# Altium PCB msp430g2553.PcbDoc
Units mil, origin at the board's own origin, x right, y up, seen from the top; angles counter-clockwise.
Board outline 2835.03 x 2250.03 mil, 2 copper layers (Top Layer, Bottom Layer); 24 components, 21 nets, 103 pads, 0 vias.
Unrouted connection lines stored in the file: 61.
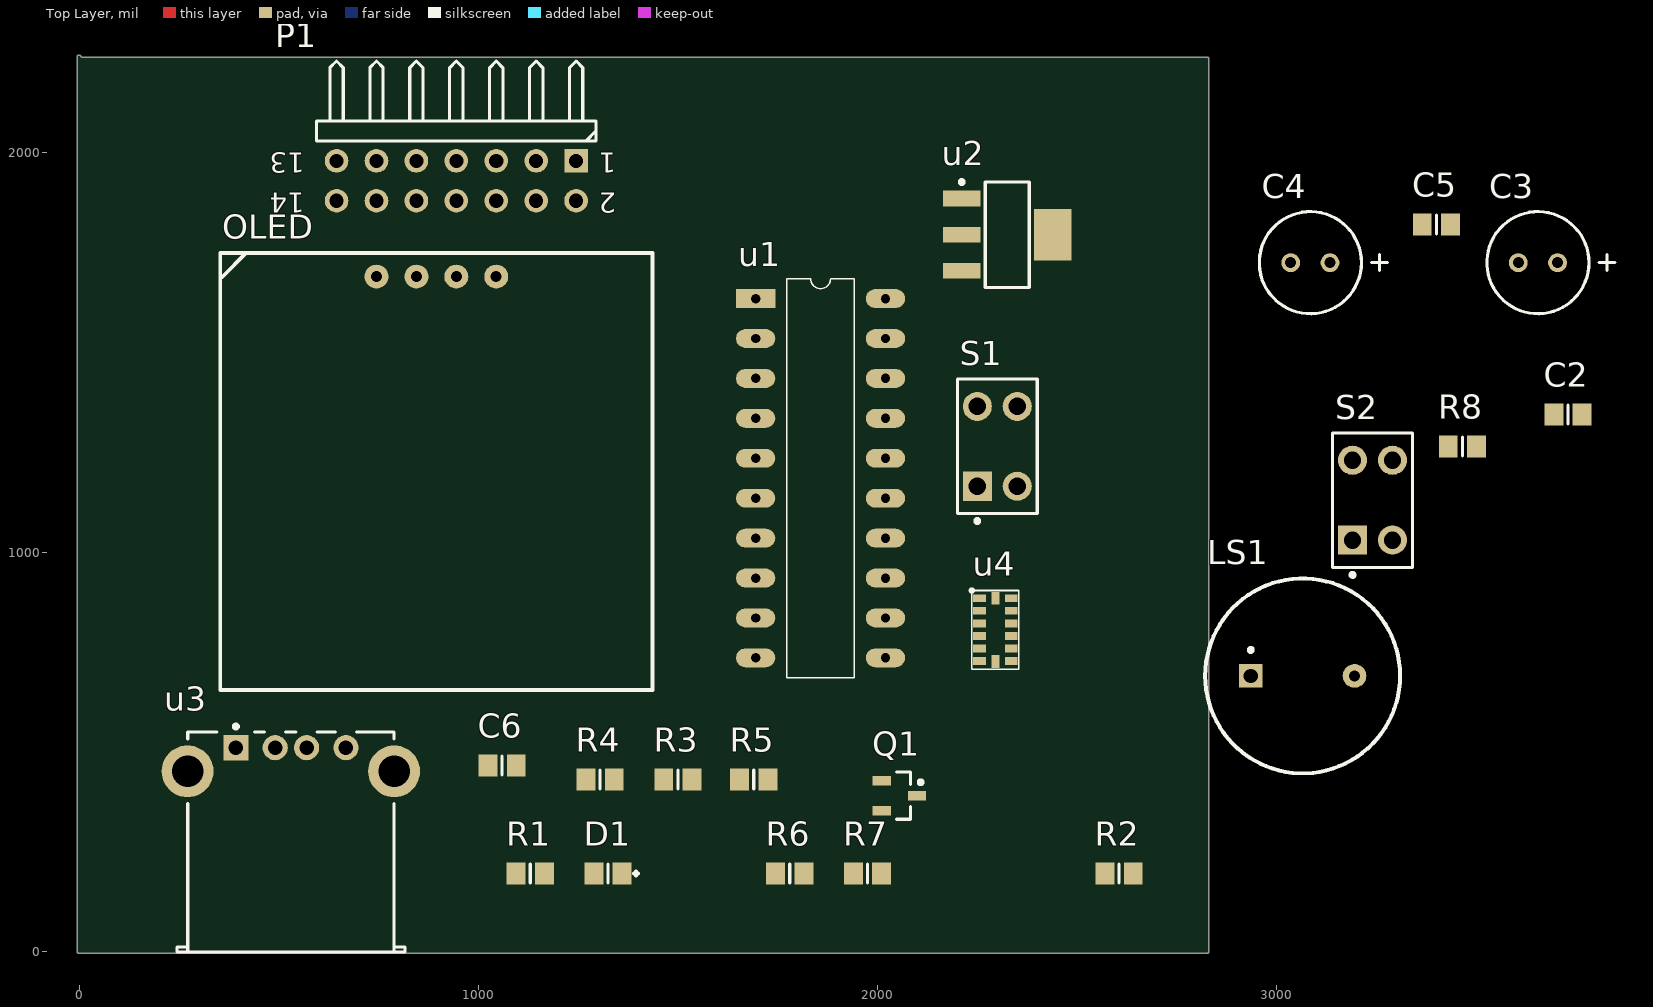
[diagram p0: Top Layer view]
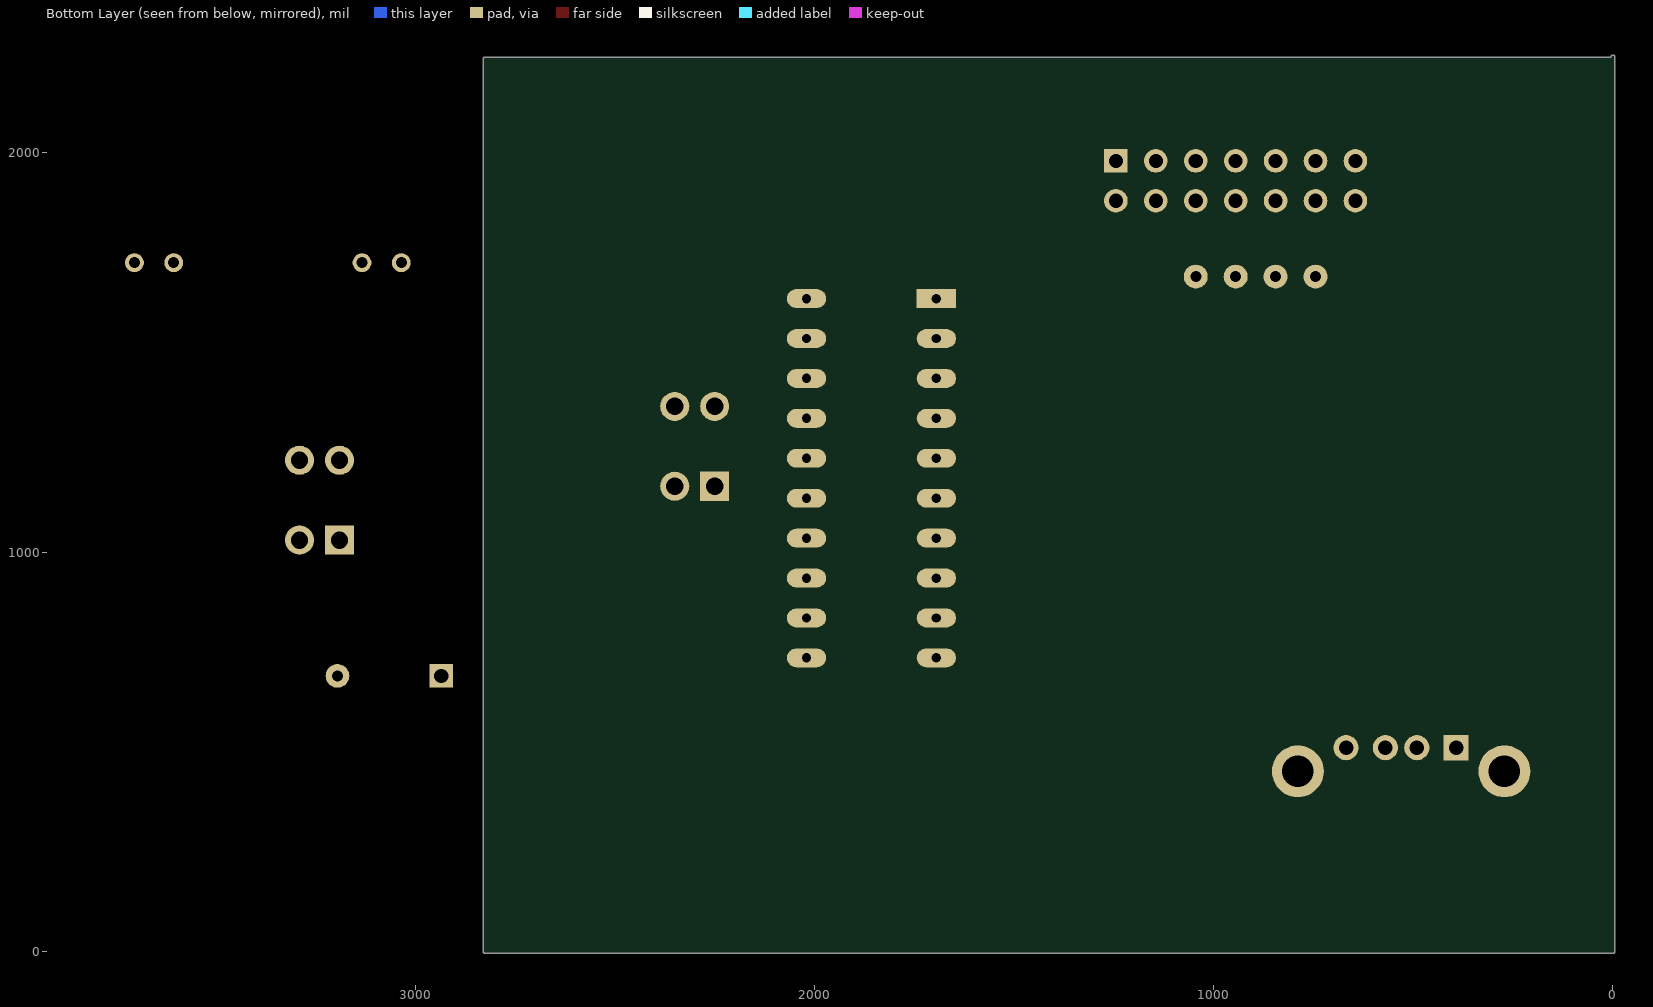
[diagram p1: Bottom Layer view, seen from below]

## Layer stack, top to bottom
Top Solder: solder mask 0.4, Solder Resist, Dk 3.5
Top Layer: signal copper 1.4
Dielectric 1: dielectric 12.6, FR-4, Dk 4.8
Bottom Layer: signal copper 1.4
Bottom Solder: solder mask 0.4, Solder Resist, Dk 3.5

## Board outline
0,-5.02 cw(c0,0) -5.02,0 -5.02,2240 cw(c0,2240) 5.02,2240.01 2825,2240.01 cw(c2825,2235) 2830.01,2235 2830.01,0 cw(c2825,0) 2825,-5.02

## Design rules (kind name [scope] priority, off if disabled: settings)
Clearance [All] p1: gap=10 ignorepadtopadclearanceinfootprint=FALSE except(0: Arc-Hole Track-Hole SMDPad-Hole THPad-Hole Via-Hole Fill-Hole Poly-Hole Region-Hole Text-Hole)
PolygonConnect [All] p1: connectstyle=Relief reliefconductorwidth=10 reliefentries=4 polygonreliefangle="90 Angle" airgapwidth=10
RoutingVias [All] p1: holewidth=28 width=50 viastyle="Through Hole" minholewidth=28 minwidth=50 maxholewidth=28 maxwidth=50
SolderMaskExpansion [All] p1: expansion=4
Width [All] p1: maxlimit=10 minlimit=10 preferedwidth=10
30 further rules are at their usual default settings.

## Components (designator, comment, footprint, x,y, rotation, side; value= is the part's Value field where it differs from the comment)
C2 "Cap" 6-0805_N 3729.57,1345 r0 top value=0.1uf
C3 "Cap Pol2" Cap2_polar 3605,1725 r0 top value=100uf
C4 "Cap Pol2" Cap2_polar 3035,1725 r0 top value=100uf
C5 "Cap" 6-0805_N 3400,1820 r0 top value=0.1uf
C6 "Cap" 6-0805_N 1059.57,465 r0 top value=0.1uf
D1 "LED0" "6-0805_N - duplicate" 1325,195 r0 top
LS1 "Bell" bell 2935,690 r0 top
OLED "+5" OLED 353.66,654.57 r0 top
P1 "JTAG" HDR2X7H 1245,1980 r180 top
Q1 "NPN" SOT23_N 2055,390 r0 top
R1 "Res2" 6-0805_N 1130,195 r0 top value=4.7k
R2 "Res2" 6-0805_N 2605,195 r0 top value=100R
R3 "Res2" 6-0805_N 1500,430 r0 top value=10K
R4 "Res2" 6-0805_N 1305,430 r0 top value=10K
R5 "Res2" 6-0805_N 1690,430 r0 top value=10K
R6 "Res2" 6-0805_N 1780,195 r0 top value=2K
R7 "Res2" 6-0805_N 1975,195 r0 top value=2K
R8 "Res2" 6-0805_N 3465,1265 r0 top value=2K
S1 "SW-DPST" DPST-4 2300,1265 r90 top
S2 "SW-DPST" DPST-4 3240,1130 r90 top
u1 "msp430g2553_PDIP20" DIP20 1694.8,1635 r0 top
u2 "AMS1117-3.3V" SOT223_N 2325,1795 r0 top
u3 "USB" USB2.5-2H4 530.63,-1.81 r270 top
u4 "ADXL345" ADXL345 2236.18,903.78 r0 top

## Footprints (in the part's own frame and the unit in brackets; to place one, negate y for a bottom-side part, rotate by r counter-clockwise, add the part's x,y. Pads: shape width x height; smd on the part's side, far side on the other; paste and mask are expansions set on the pad)
6-0805_N [mm] "Chip Resistor, Body 2.0x1.2mm, IPC Medium Density"
  rect 1.2x1.4 smd: 1(-0.9,0) 2(0.9,0)
  silkscreen extent 0,-0.6 0,0.6, body extent -1.07,-0.7 1.07,0.7, height 0.7
"6-0805_N - duplicate" [mm] "Chip Resistor, Body 2.0x1.2mm, IPC Medium Density"
  rect 1.2x1.4 smd: 1(-0.9,0) 2(0.9,0)
  silkscreen extent 0,-0.6 1.91,0.6, body extent -1.07,-0.7 1.07,0.7, height 0.7
ADXL345 [mm]
  rect 0.813x0.5 smd: 1(0.49,-0.49) 2(0.49,-1.29) 3(0.49,-2.09) 4(0.49,-2.89) 5(0.49,-3.69) 6(0.49,-4.49) 8(2.51,-4.49) 9(2.51,-3.69) 10(2.51,-2.89) 11(2.51,-2.09) 12(2.51,-1.29) 13(2.51,-0.49)
  rect 0.5x0.813 smd: 7(1.5,-4.51) 14(1.5,-0.49)
  silkscreen extent -0.13,-5 3,0.13
bell [mm] "Photosensitive Diode; 2 Leads"
  rect 1.5x1.5 hole 0.9: 1(0,0)
  round 1.5 hole 0.7: 2(6.6,0)
  silkscreen extent -2.9,-6.2 9.5,6.2
Cap2_polar [mm]
  round 1.2 hole 0.7: 1(0,0) 2(2.5,0)
  silkscreen extent -2,-3.25 6.15,3.25
DIP20 [mm]
  rect 2.5x1.2 hole 0.6: 1(0,0)
  oval 2.5x1.2 hole 0.6: 2(0,-2.54) 3(0,-5.08) 4(0,-7.62) 5(0,-10.16) 6(0,-12.7) 7(0,-15.24) 8(0,-17.78) 9(0,-20.32) 10(0,-22.86) 11(8.26,-22.86) 12(8.26,-20.32) 13(8.26,-17.78) 14(8.26,-15.24) 15(8.26,-12.7) 16(8.26,-10.16) 17(8.26,-7.62) 18(8.26,-5.08) 19(8.26,-2.54) 20(8.26,0)
  silkscreen extent 1.98,-24.13 6.28,1.27
DPST-4 [mm] "Switch; 4 Leads"
  rect 1.85x1.85 hole 1.1: 1(-2.54,1.27)
  round 1.85 hole 1.1: 2(-2.54,-1.27) 3(2.54,-1.27) 4(2.54,1.27)
  silkscreen extent -4.88,-2.54 4.28,2.54
HDR2X7H [mm] "Connector; Header; 7x2 Position; Right Angle"
  rect 1.5x1.5 hole 0.9: 1(0,0)
  round 1.5 hole 0.9: 2(0,2.54) 3(2.54,0) 4(2.54,2.54) 5(5.08,0) 6(5.08,2.54) 7(7.62,0) 8(7.62,2.54) 9(10.16,0) 10(10.16,2.54) 11(12.7,0) 12(12.7,2.54) 13(15.24,0) 14(15.24,2.54)
  silkscreen extent -1.27,-6.35 16.51,-1.27
OLED [mm]
  round 1.524 hole 0.7: 1(12.48,26.3) 2(9.94,26.3) 3(15.02,26.3) 4(17.56,26.3)
  silkscreen extent 0,0 27.5,27.81
SOT23_N [mm] "SOT23, 3-Leads, Body 2.9x1.3mm, Pitch 0.95mm, Lead Span 2.3mm - Reverse Pinning, IPC Medium Density"
  rect 1.15x0.6 smd: 1(1.125,0) 2(-1.125,-0.95) 3(-1.125,0.95)
  silkscreen extent -0.2,-1.5 1.48,1.5, body extent -0.7,-1.5 0.7,1.5, height 1.1
SOT223_N [mm] "SOT223, 4-Leads, Body 6.5x3.5mm, Pitch 2.3mm, Lead Span 7mm, IPC Medium Density"
  rect 2.4x1 smd: 1(-2.9,2.3) 2(-2.9,0) 3(-2.9,-2.3)
  rect 2.4x3.3 smd: 4(2.9,0)
  silkscreen extent -3.02,-3.35 1.4,3.47, body extent -1.85,-3.35 1.85,3.35, height 1.7
USB2.5-2H4 [mm] "Connector; USB1.1, Series A, Reverse Type, Thru-Hole; 4 Position; Right Angle"
  rect 1.6x1.6 hole 0.92: 1(-13,-3.5)
  round 1.6 hole 0.92: 2(-13,-1) 3(-13,1) 4(-13,3.5)
  round 3.3 hole 2: 5(-11.5,6.57) 6(-11.5,-6.57)
  silkscreen extent -14.47,-7.25 0,7.25, body extent -14,-7.25 0,7.25, height 6.5

## Part data
C2 C5 C6: "Capacitor", LatestRevisionDate=17-Jul-2002, LatestRevisionNote="Re-released for DXP Platform.", PackageDescription="Radial Cap, Thru-Hole; 2 Leads; 0.3 in Pin Spacing", PackageReference=RAD-0.3, Published=8-Jun-2000, Publisher="Altium Limited"
C3 C4: "Polarized Capacitor (Axial)", LatestRevisionDate=17-Jul-2002, LatestRevisionNote="Re-released for DXP Platform.", PackageDescription="Polarized Capacitor; 2 Leads", PackageReference=POLAR0.8, Published=8-Jun-2000, Publisher="Altium Limited"
D1: "Typical INFRARED GaAs LED", LatestRevisionDate=08-Jul-2005, LatestRevisionNote="Mech Layer 1 removed.", PackageDescription="LED; 2 Leads", PackageReference=LED-0, Published=8-Jun-2000, Publisher="Altium Limited"
LS1: "Electrical Bell", LatestRevisionDate=17-Jul-2002, LatestRevisionNote="Re-released for DXP Platform.", PackageReference=PIN2, Published=24-Mar-1999, Publisher="Altium Limited"
OLED: library part OLED
P1: "Header, 7-Pin, Dual row", LatestRevisionDate=17-Jul-2002, LatestRevisionNote="Re-released for DXP Platform.", Publisher="Altium Limited"
Q1: "NPN Bipolar Transistor", Code_JEDEC=TO-226-AA, LatestRevisionDate=17-Jul-2002, LatestRevisionNote="Re-released for DXP Platform.", PackageDescription="TO, Flat Index; 3 In-Line, Axial Leads; Body Dia. 4.8mm; Leads 0.55 x 0.51 mm (max)", PackageReference=TO-226-AA, Published=8-Jun-2000, Publisher="Altium Limited"
R1 R2 R3 R4 R5 R6 R7 R8: "Resistor", LatestRevisionDate=17-Jul-2002, LatestRevisionNote="Re-released for DXP Platform.", PackageDescription="Axial Device, Thru-Hole; 2 Leads; 0.4 in Pin Spacing", PackageReference=AXIAL-0.4, Published=8-Jun-2000, Publisher="Altium Limited"
S1 S2: "Double-Pole, Single-Throw Switch", LatestRevisionDate=17-Jul-2002, LatestRevisionNote="Re-released for DXP Platform.", PackageDescription="Switch; 4 Leads", PackageReference=DPST-4, Published=24-Mar-1999, Publisher="Altium Limited"

## Nets (pads, with @x,y where several pads share a name; then routed paths per layer and width w, separated by ;. In a path a pad name is that pad's centre, name@x,y a point inside that pad or via, vN(x,y) a via of type N, cw(c..) or ccw(c..) an arc to the next point about the centre after c; other vN are vias at no path point)
3.3: C4.2 C5.1 C5.2 u2.2 u2.4
+5: C3.2 u2.3 u3.1
+5V: OLED.1 R2.1
BEEP: R1.1 u1.13
CS: R5.1 u1.10 u4.7
GND: C2.1 C3.1 C4.1 C6.1 OLED.2 P1.9 Q1.3 S1.3 S1.4 S2.1 S2.2 u1.20 u2.1 u3.4 u4.2 u4.4 u4.5 u4.12
LED1: D1.2 u1.19
NetD1_1: D1.1 R6.1
NetLS1_1: LS1.1 R2.2
NetLS1_2: LS1.2 Q1.1
NetQ1_2: Q1.2 R1.2
RST: P1.11 R8.1 S2.3 S2.4 u1.16
SCL: OLED.3 P1.3 u1.14
SCLK: R4.1 u1.8 u4.14
SDA: OLED.4 P1.1 u1.15
SDI: R3.1 u1.9 u4.13
SW: R7.1 S1.1 S1.2 u1.11
TCK: P1.7 u1.6
TEST: P1.8 u1.17
TMS: P1.5 u1.7
VDD3V3: C2.2 C6.2 P1.4 R3.2 R4.2 R5.2 R6.2 R7.2 R8.2 u1.1 u4.1 u4.6
pads on no net: P1.2 P1.6 P1.10 P1.12 P1.13 P1.14 u1.2 u1.3 u1.4 u1.5 u1.12 u1.18 u3.2 u3.3 u3.5 u3.6 u4.3 u4.8 u4.9 u4.10 u4.11

## Silkscreen, mask and mechanical layers (free items; w line width, h text height)
Mechanical 1:
  lines w10: 10,2235 0,2235 ; 2825,15 2825,2235 0,2235 ; 2825,25 2825,0 1785,0 0,0 0,2240 0,2235

## Text inside footprints (layer, text, board x,y; h text height)
P1: Top Overlay "2" at 1345,1900 h50 r180; Top Overlay "1" at 1345,2000 h50 r180; Top Overlay "13" at 565,2000 h50 r180; Top Overlay "14" at 565,1900 h50 r180
u3: Mechanical 1 "PCB Edge" at 282.47,11.4 h9.84